# EAGLE board pcb (EAGLE 9.7.0)
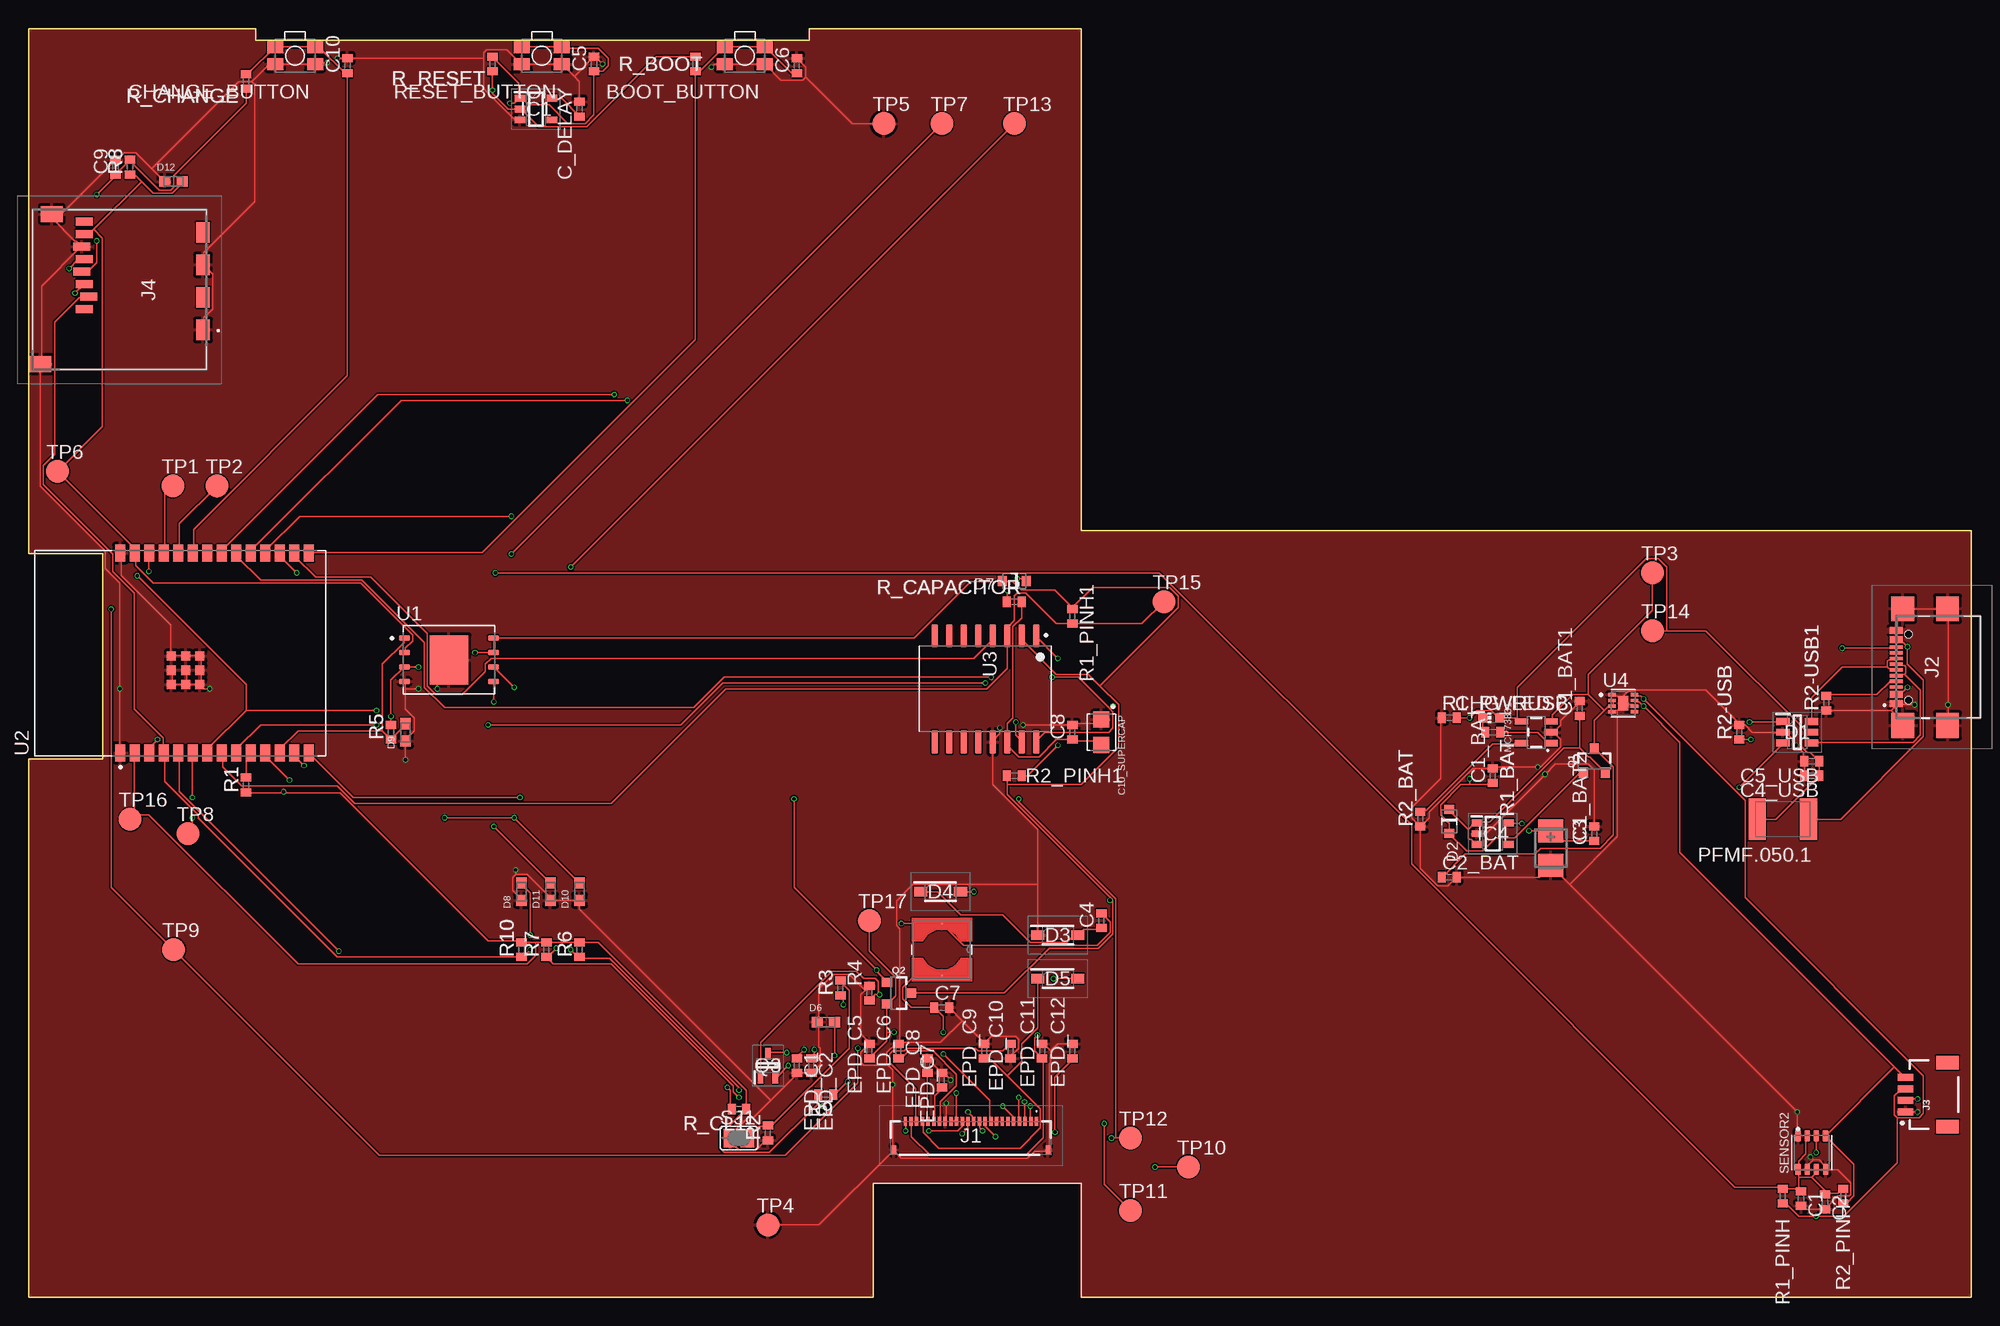
[diagram p0: board, top side]
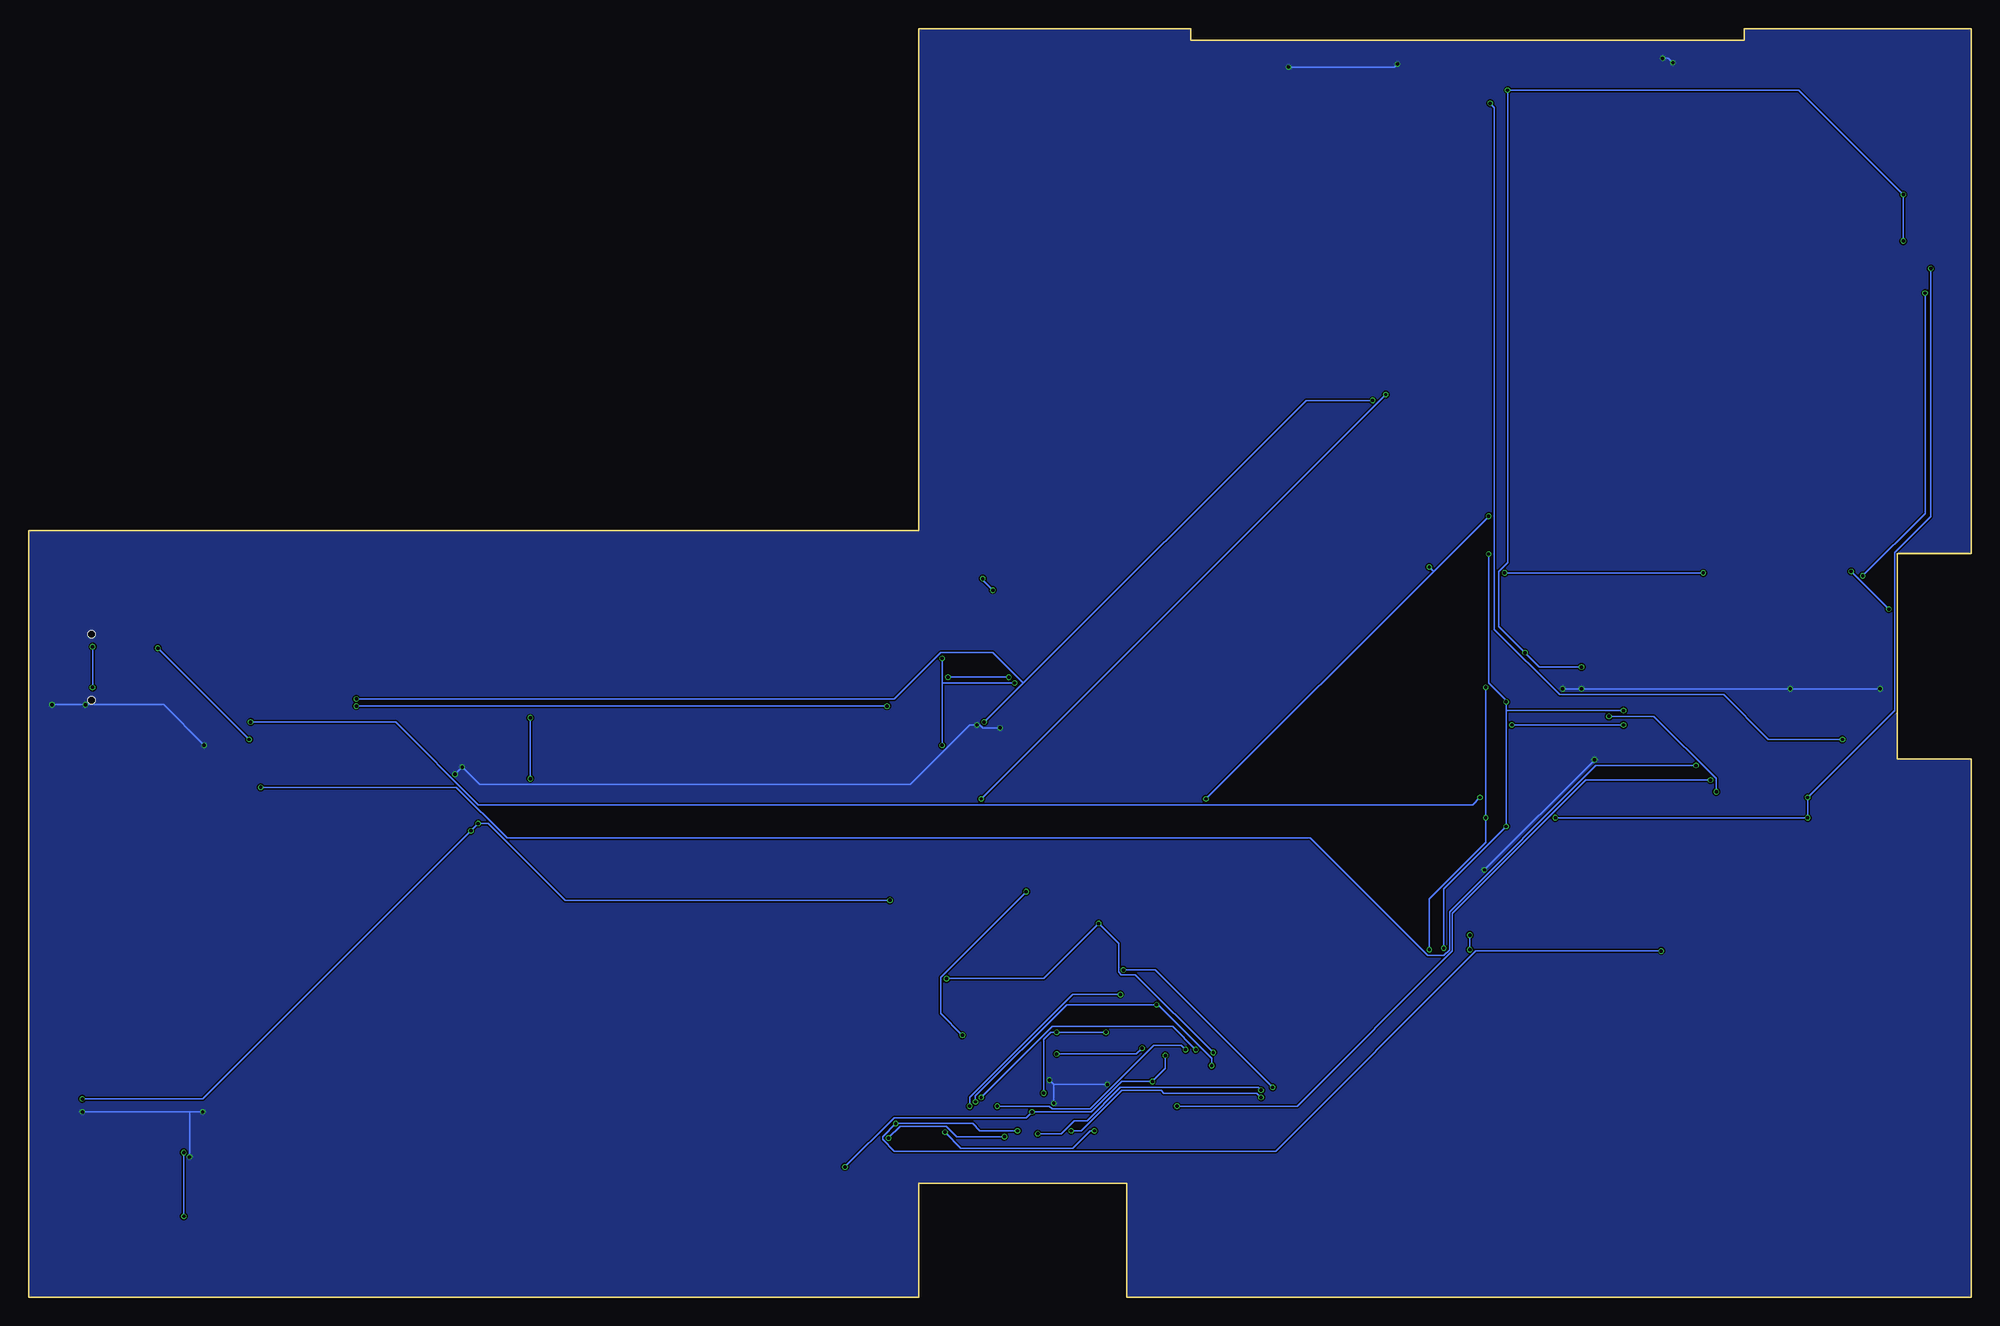
[diagram p1: board, bottom side, seen from below]

Size 170.2 x 111.2 mm. Coordinates in mm from the lower left corner, seen from the top.
Outline: 0,111.2 0,65.2 6.5,65.2 6.5,47.2 0,47.2 0,0 74,0 74,10 92.2,10 92.2,0 170.2,0 170.2,67.2 92.2,67.2 92.2,111.2 68.4,111.2 68.4,110.18 19.92,110.18 19.92,111.2 0,111.2
Copper layers (1*16): Top 0.035mm / dielectric 1.6mm / Bottom 0.035mm
Design rules "jlcpcb-2layers": minimum track width 5mil, minimum drill 0.3mm, track to track 5mil, track to pad 5mil, pad to pad 5mil, via to via 5mil, smd to smd 5mil, copper to edge 0mil, drill to drill 6mil, minimum pad ring 10mil, minimum via ring 3mil, stop-mask expansion 4mil, vias tented up to drill 0mil, thermal gap 10mil

## Footprints (pad centres in the part's own frame; a part is rotated, then mirrored left to right if it is on the bottom)
MYBUTTON = smd 1.4 x 1.05: 1 1.75,0.75; 2 -1.75,0.75; 3 -1.75,-0.75; 4 1.75,-0.75
EAGLE-LTSPICE_C0402 = smd 0.7 x 0.9: 1 -0.65,0; 2 0.65,0
RCL_CT3528 = smd 2 x 2.2: + -1.5,0; - 1.5,0
CAPCP3225X100N = smd 1.4 x 1.4: 1 -1.1,0; 2 1.1,0
ADAFRUIT_CHIP-LED0603 = smd 0.8 x 0.8: A 0,-0.75; C 0,0.75
SOT95P280X145-6N = smd 1.2 x 0.6: 1 -1.25,0.95; 2 -1.25,0; 3 -1.25,-0.95; 4 1.25,-0.95; 5 1.25,0; 6 1.25,0.95
ESP32_WROVER_AVX---SD0805S020S1R0_AVX_SD0805S020S1R0_0 = smd 0.8 x 0.9: 1 -1.05,0; 2 1.05,0
SOD3716X135N = smd 1.15 x 0.8: 1 -1.75,0; 2 1.75,0
DIOC1608X36N = smd 0.97 x 0.94: 1 -0.75,0; 2 0.75,0
ESP32_WROVER_EAGLE-LTSPICE_C0402 = smd 0.7 x 0.9: 1 -0.65,0; 2 0.65,0
SOT95P280X125-5N = smd 0.9 x 0.6: 1 -1.4,0.95; 2 -1.4,0; 3 -1.4,-0.95; 4 1.4,-0.95; 5 1.4,0.95
SOT95P280X120-5N = smd 0.9 x 0.6: 1 -1.4,0.95; 2 -1.4,0; 3 -1.4,-0.95; 4 1.4,-0.95; 5 1.4,0.95
FH34SRJ24S05SH99 = smd 0.3 x 0.8: 1 5.75,1.45; 2 5.25,1.45; 3 4.75,1.45; 4 4.25,1.45; 5 3.75,1.45; 6 3.25,1.45; 7 2.75,1.45; 8 2.25,1.45; 9 1.75,1.45; 10 1.25,1.45; 11 0.75,1.45; 12 0.25,1.45; 13 -0.25,1.45; 14 -0.75,1.45; 15 -1.25,1.45; 16 -1.75,1.45; 17 -2.25,1.45; 18 -2.75,1.45; 19 -3.25,1.45; 20 -3.75,1.45; 21 -4.25,1.45; 22 -4.75,1.45; 23 -5.25,1.45; 24 -5.75,1.45 | smd 0.4 x 0.8: MP1 6.75,-1.05; MP2 -6.75,-1.05
SAMACSYS_PARTS_USB4110GFA = smd 0.3 x 1.15: A1 -3.35,3.678; A4 -2.55,3.678; A5 -1.25,3.678; A6 -0.25,3.678; A7 0.25,3.678; A8 1.25,3.678; A9 2.55,3.678; A12 3.35,3.678; B1 3.05,3.678; B4 2.25,3.678; B5 1.75,3.678; B6 0.75,3.678; B7 -0.75,3.678; B8 -1.75,3.678; B9 -2.25,3.678; B12 -3.05,3.678 | smd 2.18 x 2: MP1 -5.11,-0.827; MP2 5.11,-0.827; MP3 -5.11,3.103; MP4 5.11,3.103 | hole 0.65: -2.89,2.603; 2.89,2.603
JST04_1MM_RA = smd 0.6 x 1.35: 1 -1.5,0; 2 -0.5,0; 3 0.5,0; 4 1.5,0 | smd 1.2 x 2: NC1 2.8,-3.675; NC2 -2.8,-3.675
112ATAARR03ATTEND = smd 1.8 x 1.2: G1 10.6,10.4; G2 4.9,10.4; S1 7.75,10.4; S2 2.05,10.4 | smd 1.4 x 1.9: G3 13.6,-3.85; G4 0.45,-2.85 | smd 0.7 x 1.5: P1 8.8,0; P2 7.7,0.4; P3 6.6,0; P4 5.5,-0.2; P5 4.4,0; P6 3.3,-0.2; P7 2.2,0; P8 1.1,0
IND_4828-WE-TPC_WRE = smd 0.127 x 0.127: 1 -2.286,0; 2 2.286,0
ESP32_WROVER_SPARKFUN-IC-POWER_SOT23-5 = smd 0.55 x 1.2: 1 -0.95,-1.3; 2 0,-1.3; 3 0.95,-1.3; 4 0.95,1.3; 5 -0.95,1.3
ESP32C6_VARISTOR_CT/CN1812 = smd 1.5 x 3.6: 1 -2.25,0; 2 2.25,0
ESP32_WROVER_SPARKFUN-DISCRETESEMI_SOT23-3 = smd 0.8 x 0.9: 1 -0.95,-1; 2 0.95,-1; 3 0,1.1
SOT65P210X110-3N = smd 1.05 x 0.5: 1 -1.05,0.65; 2 -1.05,-0.65; 3 1.05,0
ESP32_WROVER_EAGLE-LTSPICE_R0402 = smd 0.7 x 0.9: 1 -0.65,0; 2 0.65,0
ESP32_WROVER_BME680_PSON80P300X300X100-8N = smd 1.016 x 0.5: 1 1.458,1.2; 2 1.458,0.4; 3 1.458,-0.4; 4 1.458,-1.2; 5 -1.458,-1.22; 6 -1.458,-0.4; 7 -1.458,0.4; 8 -1.458,1.2
SJ = smd 1.168 x 1.6: 1 -0.762,0; 2 0.762,0
TP20R = smd 2 x 2: TP 0,0
SON127P600X800X80-9N = smd 0.94 x 0.44: 1 -3.895,1.905; 2 -3.895,0.635; 3 -3.895,-0.635; 4 -3.895,-1.905; 5 3.895,-1.905; 6 3.895,-0.635; 7 3.895,0.635; 8 3.895,1.905 | smd 3.4 x 4.3: 9 0,0
XCVR_ESP32-C6-WROOM-1-N8 = smd 1.5 x 0.9: 1 -8.75,5.26; 2 -8.75,3.99; 3 -8.75,2.72; 4 -8.75,1.45; 5 -8.75,0.18; 6 -8.75,-1.09; 7 -8.75,-2.36; 8 -8.75,-3.63; 9 -8.75,-4.9; 10 -8.75,-6.17; 11 -8.75,-7.44; 12 -8.75,-8.71; 13 -8.75,-9.98; 14 -8.75,-11.25; 15 8.75,-11.25; 16 8.75,-9.98; 17 8.75,-8.71; 18 8.75,-7.44; 19 8.75,-6.17; 20 8.75,-4.9; 21 8.75,-3.63; 22 8.75,-2.36; 23 8.75,-1.09; 24 8.75,0.18; 25 8.75,1.45; 26 8.75,2.72; 27 8.75,3.99; 28 8.75,5.26 | smd 0.8 x 0.8: 29_1 -2.755,0.79; 29_2 -1.505,0.79; 29_3 -0.255,0.79; 29_4 -2.755,-0.46; 29_5 -1.505,-0.46; 29_6 -0.255,-0.46; 29_7 -2.755,-1.71; 29_8 -1.505,-1.71; 29_9 -0.255,-1.71
SOIC127P1032X265-16N = smd 2.05 x 0.59: 1 -4.655,4.445; 2 -4.655,3.175; 3 -4.655,1.905; 4 -4.655,0.635; 5 -4.655,-0.635; 6 -4.655,-1.905; 7 -4.655,-3.175; 8 -4.655,-4.445; 9 4.655,-4.445; 10 4.655,-3.175; 11 4.655,-1.905; 12 4.655,-0.635; 13 4.655,0.635; 14 4.655,1.905; 15 4.655,3.175; 16 4.655,4.445
SON50P200X200X80-9N = smd 0.76 x 0.27: 1 -0.985,0.75; 2 -0.985,0.25; 3 -0.985,-0.25; 4 -0.985,-0.75; 5 0.985,-0.75; 6 0.985,-0.25; 7 0.985,0.25; 8 0.985,0.75 | smd 0.9 x 1.3: 9 0,0

## Placement (x,y rotation side)
BOOT_BUTTON  BUTTON_CUSYOMV1  [MYBUTTON]  62.74,108.83 180 top
C1  100nF  [EAGLE-LTSPICE_C0402]  155.27,8.67 270 top
C1_BAT  4.7uF  [EAGLE-LTSPICE_C0402]  128.27,45.72 90 top
C1_BAT1  4.7uF  [EAGLE-LTSPICE_C0402]  135.89,51.62 90 top
C1_BAT2  4.7uF  [EAGLE-LTSPICE_C0402]  137.16,40.64 90 top
C2  100nF  [EAGLE-LTSPICE_C0402]  157.37,8.37 270 top
C2_BAT  4.7uF  [EAGLE-LTSPICE_C0402]  124.46,36.83 0 top
C3  100uF TANT  [RCL_CT3528]  133.35,39.37 270 top
C4  4.7uF/25V  [EAGLE-LTSPICE_C0402]  93.98,33.02 90 top
C4_USB  100nF  [EAGLE-LTSPICE_C0402]  156.21,45.72 180 top
C5  1uF  [EAGLE-LTSPICE_C0402]  49.53,108.09 90 top
C5_USB  4.7uF  [EAGLE-LTSPICE_C0402]  156.21,46.99 180 top
C6  100nF  [EAGLE-LTSPICE_C0402]  67.31,107.95 90 top
C7  10uF  [EAGLE-LTSPICE_C0402]  80.01,25.4 0 top
C8  100nF  [EAGLE-LTSPICE_C0402]  91.44,49.53 90 top
C9  100nF  [EAGLE-LTSPICE_C0402]  7.62,99.06 90 top
C10  100nF  [EAGLE-LTSPICE_C0402]  27.94,107.95 90 top
C10_SUPERCAP  CPH3225A  [CAPCP3225X100N]  93.98,49.53 270 top
C_DELAY  100nF  [EAGLE-LTSPICE_C0402]  48.26,104.14 90 top
CHANGE_BUTTON  BUTTON_CUSYOMV1  [MYBUTTON]  23.35,108.83 180 top
CHG_LED  [ADAFRUIT_CHIP-LED0603]  128.12,50.8 90 top
D1  USBLC6-2SC6Y  [SOT95P280X145-6N]  154.94,49.53 0 top
D2  ESP32_WROVER_AVX---SD0805S020S1R0_AVX_SD0805S020S1R0_0_0AVX_SD0805S020S1R0_0_0  [ESP32_WROVER_AVX---SD0805S020S1R0_AVX_SD0805S020S1R0_0]  124.46,41.71 270 top
D3  MBR0530  [SOD3716X135N]  90.17,31.75 0 top
D4  MBR0530  [SOD3716X135N]  79.89,35.56 0 top
D5  MBR0530  [SOD3716X135N]  90.17,27.94 0 top
D6  PGB1010603MR  [DIOC1608X36N]  69.85,24.13 0 top
D7  ESP32_WROVER_AVX---SD0805S020S1R0_AVX_SD0805S020S1R0_0_0AVX_SD0805S020S1R0_0_0  [ESP32_WROVER_AVX---SD0805S020S1R0_AVX_SD0805S020S1R0_0]  86.36,62.79 180 top
D8  PGB1010603MR  [DIOC1608X36N]  43.18,35.56 90 top
D9  PGB1010603MR  [DIOC1608X36N]  33.02,49.53 90 top
D10  PGB1010603MR  [DIOC1608X36N]  48.26,35.56 90 top
D11  PGB1010603MR  [DIOC1608X36N]  45.72,35.56 90 top
D12  PGB1010603MR  [DIOC1608X36N]  12.7,97.79 0 top
EPD_C1  1uF/50V  [ESP32_WROVER_EAGLE-LTSPICE_C0402]  67.31,20.32 270 top
EPD_C2  1uF/50V  [ESP32_WROVER_EAGLE-LTSPICE_C0402]  68.58,20.32 270 top
EPD_C5  0.1uF/50V  [ESP32_WROVER_EAGLE-LTSPICE_C0402]  73.66,21.59 90 top
EPD_C6  1uF/50V  [ESP32_WROVER_EAGLE-LTSPICE_C0402]  76.2,21.59 90 top
EPD_C7  1uF/50V  [ESP32_WROVER_EAGLE-LTSPICE_C0402]  80.01,19.05 90 top
EPD_C8  1uF/50V  [ESP32_WROVER_EAGLE-LTSPICE_C0402]  78.74,20.32 90 top
EPD_C9  1uF/50V  [ESP32_WROVER_EAGLE-LTSPICE_C0402]  83.71,21.59 90 top
EPD_C10  1uF/50V  [ESP32_WROVER_EAGLE-LTSPICE_C0402]  86.03,21.59 270 top
EPD_C11  1uF/50V  [ESP32_WROVER_EAGLE-LTSPICE_C0402]  88.79,21.59 90 top
EPD_C12  1uF/50V  [ESP32_WROVER_EAGLE-LTSPICE_C0402]  91.44,21.59 90 top
IC1  BD5229G-TR  [SOT95P280X125-5N]  44.45,104.14 0 top
IC4  XC6220A331MR-G  [SOT95P280X120-5N]  128.27,40.64 0 top
J1  FH34SRJ-24S-0.5SH_99_  [FH34SRJ24S05SH99]  82.55,13.97 0 top
J2  SAMACSYS_PARTS_USB4110-GF-A  [SAMACSYS_PARTS_USB4110GFA]  167.28,55.24 90 top
J3  QWIIC_RIGHT_ANGLE  [JST04_1MM_RA]  164.43,17.78 90 top
J4  112A-TAAR-R03_ATTEND  [112ATAARR03ATTEND]  4.88,95.39 270 top
L1  68uH  [IND_4828-WE-TPC_WRE]  80.01,30.48 270 top
MCP73831  ESP32_WROVER_SPARKFUN-IC-POWER_MCP73831  [ESP32_WROVER_SPARKFUN-IC-POWER_SOT23-5]  132.08,49.53 90 top
PFMF.050.1  ESP32C6_VARISTORCN1812  [ESP32C6_VARISTOR_CT/CN1812]  153.67,41.91 180 top
Q1  20V/4.2A/52mΩ/1.4W  [ESP32_WROVER_SPARKFUN-DISCRETESEMI_SOT23-3]  137.16,46.99 0 top
Q2  20V/4.2A/52mΩ/1.4W  [ESP32_WROVER_SPARKFUN-DISCRETESEMI_SOT23-3]  76.2,26.67 270 top
Q3  SI1308EDL-T1-GE3  [SOT65P210X110-3N]  64.77,20.32 90 top
R1  10K  [ESP32_WROVER_EAGLE-LTSPICE_R0402]  19.05,44.9 90 top
R1_BAT  200  [ESP32_WROVER_EAGLE-LTSPICE_R0402]  128.27,49.53 180 top
R1_PINH  10K  [ESP32_WROVER_EAGLE-LTSPICE_R0402]  153.67,8.89 90 top
R1_PINH1  10K  [ESP32_WROVER_EAGLE-LTSPICE_R0402]  91.44,59.69 90 top
R1_PWRUSB  100K  [ESP32_WROVER_EAGLE-LTSPICE_R0402]  124.46,50.8 0 top
R2  2.2  [ESP32_WROVER_EAGLE-LTSPICE_R0402]  64.77,14.42 90 top
R2-USB  5k1  [ESP32_WROVER_EAGLE-LTSPICE_R0402]  149.86,49.53 90 top
R2-USB1  5k1  [ESP32_WROVER_EAGLE-LTSPICE_R0402]  157.48,52.07 90 top
R2_BAT  2K  [ESP32_WROVER_EAGLE-LTSPICE_R0402]  121.92,41.91 90 top
R2_PINH  10K  [ESP32_WROVER_EAGLE-LTSPICE_R0402]  158.97,8.89 90 top
R2_PINH1  10K  [ESP32_WROVER_EAGLE-LTSPICE_R0402]  86.36,45.72 180 top
R3  0.47  [ESP32_WROVER_EAGLE-LTSPICE_R0402]  71.12,27.12 90 top
R4  10K  [ESP32_WROVER_EAGLE-LTSPICE_R0402]  73.66,26.67 90 top
R5  10K  [ESP32_WROVER_EAGLE-LTSPICE_R0402]  31.75,49.53 90 top
R6  10K  [ESP32_WROVER_EAGLE-LTSPICE_R0402]  48.26,30.48 90 top
R7  10K  [ESP32_WROVER_EAGLE-LTSPICE_R0402]  45.37,30.48 90 top
R8  10K  [ESP32_WROVER_EAGLE-LTSPICE_R0402]  8.89,99.06 90 top
R9  10K  [ESP32_WROVER_EAGLE-LTSPICE_R0402]  69.85,17.78 180 top
R10  10K  [ESP32_WROVER_EAGLE-LTSPICE_R0402]  43.18,30.48 90 top
R_BOOT  10K  [ESP32_WROVER_EAGLE-LTSPICE_R0402]  58.42,108.09 270 top
R_CAPACITOR  15  [ESP32_WROVER_EAGLE-LTSPICE_R0402]  86.36,60.96 0 top
R_CHANGE  10K  [ESP32_WROVER_EAGLE-LTSPICE_R0402]  19.05,106.56 90 top
R_CL1  10K  [ESP32_WROVER_EAGLE-LTSPICE_R0402]  62.23,16.51 180 top
R_RESET  10K  [ESP32_WROVER_EAGLE-LTSPICE_R0402]  40.64,108.09 90 top
RESET_BUTTON  BUTTON_CUSYOMV1  [MYBUTTON]  44.96,108.83 180 top
SENSOR2  ESP32_WROVER_BME680_BME680  [ESP32_WROVER_BME680_PSON80P300X300X100-8N]  156.21,12.7 90 top
SJ1  [SJ]  62.23,13.97 0 top
TP1  TPTP20R  [TP20R]  12.64,71.12 0 top
TP2  TPTP20R  [TP20R]  16.51,71.12 0 top
TP3  TPTP20R  [TP20R]  142.24,63.5 0 top
TP4  TPTP20R  [TP20R]  64.77,6.35 0 top
TP5  TPTP20R  [TP20R]  74.93,102.87 0 top
TP6  TPTP20R  [TP20R]  2.54,72.39 0 top
TP7  TPTP20R  [TP20R]  80.01,102.87 0 top
TP8  TPTP20R  [TP20R]  13.97,40.64 0 top
TP9  TPTP20R  [TP20R]  12.7,30.48 0 top
TP10  TPTP20R  [TP20R]  101.6,11.43 0 top
TP11  TPTP20R  [TP20R]  96.52,7.62 0 top
TP12  TPTP20R  [TP20R]  96.52,13.97 0 top
TP13  TPTP20R  [TP20R]  86.36,102.87 0 top
TP14  TPTP20R  [TP20R]  142.24,58.42 0 top
TP15  TPTP20R  [TP20R]  99.45,60.96 0 top
TP16  TPTP20R  [TP20R]  8.89,41.91 0 top
TP17  TPTP20R  [TP20R]  73.66,33.02 0 top
U1  W25Q512JVEIQ  [SON127P600X800X80-9N]  36.83,55.88 0 top
U2  ESP32-C6-WROOM-1-N8  [XCVR_ESP32-C6-WROOM-1-N8]  13.3,56.47 90 top
U3  DS3231SN#  [SOIC127P1032X265-16N]  83.82,53.34 270 top
U4  MAX17048G+T10  [SON50P200X200X80-9N]  139.7,52.07 0 top

## Library data of the parts
BOOT_BUTTON CHANGE_BUTTON CHG_LED PFMF.050.1 RESET_BUTTON SJ1 TP1-TP17 = openbook_library
C1 C1_BAT C1_BAT1 C1_BAT2 C2 C2_BAT C4 C4_USB C5 C5_USB C6-C10 C_DELAY EPD_C1 EPD_C2 EPD_C5-EPD_C9 EPD_C11 EPD_C12 = openbook_library; SPICEMODEL: NONE; SPICEPREFIX: C
C3 = openbook_library; SPICEPREFIX: C
C10_SUPERCAP = openbook_library; AVAILABILITY: Not in stock; CHECK_PRICES: https://www.snapeda.com/parts/CPH3225A/Seiko+Instruments/view-part/?ref=eda; DESCRIPTION: 11 mF (EDLC) Supercapacitor 3.3 V 1210 (3225 Metric) - -; MF: Seiko Instruments; MP: CPH3225A; PACKAGE: 1210 Seiko; PRICE: None; PURCHASE-URL: https://www.snapeda.com/api/url_track_click_mouser/?unipart_id=562593&manufacturer=Seiko Instruments&part_name=CPH3225A&search_term=None; SNAPEDA_LINK: https://www.snapeda.com/parts/CPH3225A/Seiko+Instruments/view-part/?ref=snap
D1 = openbook_library; AVAILABILITY: In Stock; CHECK_PRICES: https://www.snapeda.com/parts/USBLC6-2SC6Y/STMicroelectronics/view-part/?ref=eda; DESCRIPTION: 17V Clamp 5A (8/20µs) Ipp Tvs Diode Surface Mount SOT-23-6; MF: STMicroelectronics; MP: USBLC6-2SC6Y; PACKAGE: SOT-23-6 STMicroelectronics; PRICE: None; SNAPEDA_LINK: https://www.snapeda.com/parts/USBLC6-2SC6Y/STMicroelectronics/view-part/?ref=snap
D2 D7 = openbook_library; CENTROID_NOT_SPECIFIED: No; DATASHEET: http://datasheets.avx.com/schottky.pdf; DIGIKEY_DESCRIPTION: DIODE SCHOTTKY 20V 1A 0805; DIGIKEY_PART_NUMBER: 478-7800-1-ND; LEAD_FREE: yes; MF: AVX; MOUSER_PART_NUMBER: 581-SD0805S020S1R0; PACKAGE: 0805 (2012 metric); PREFIX: D; ROHS: yes; TEMPERATURE_RANGE_HIGH: +125°C; TEMPERATURE_RANGE_LOW: -55°C
D3-D5 = openbook_library; AVAILABILITY: In Stock; CHECK_PRICES: https://www.snapeda.com/parts/MBR0530/Onsemi/view-part/?ref=eda; DESCRIPTION: Diode Schottky 30 V 500mA Surface Mount SOD-123; MF: ON Semiconductor; MP: MBR0530; PACKAGE: SOD-123-2 ON Semiconductor; PRICE: None; PURCHASE-URL: https://www.snapeda.com/api/url_track_click_mouser/?unipart_id=179458&manufacturer=ON Semiconductor&part_name=MBR0530&search_term=None; SNAPEDA_LINK: https://www.snapeda.com/parts/MBR0530/Onsemi/view-part/?ref=snap
D6 D8-D12 = openbook_library; AVAILABILITY: In Stock; CHECK_PRICES: https://www.snapeda.com/parts/PGB1010603MR/Littelfuse/view-part/?ref=eda; DESCRIPTION: 150V (Typ) Clamp - Ipp Tvs Diode Surface Mount 0603 (1608 Metric); MF: Littelfuse Inc.; MP: PGB1010603MR; PACKAGE: 0603 Littelfuse Inc.; PRICE: None; PURCHASE-URL: https://www.snapeda.com/api/url_track_click_mouser/?unipart_id=5659453&manufacturer=Littelfuse Inc.&part_name=PGB1010603MR&search_term=None; SNAPEDA_LINK: https://www.snapeda.com/parts/PGB1010603MR/Littelfuse/view-part/?ref=snap
EPD_C10 = openbook_library; SPICEMODEL: NONE; SPICEPREFIX: EPD_C10
IC1 = openbook_library; DESCRIPTION: Voltage Detector with Adjustable Delay Time: CMOS processes are utilized to develop high precision, low current consumption CMOS reset ICs that allow arbitrary setting of the delay time. The extensive lineup includes both Nch Open Drain and CMOS output types in a wide range of detection voltages (from 2.3V to 6.0V, in 0.1V steps), enabling selection of the ideal solution based on customer requirements. In addition, the entire series is of course both lead-free and RoHS-compliant.; HEIGHT: 1.25mm; MANUFACTURER_NAME: ROHM Semiconductor; MANUFACTURER_PART_NUMBER: BD5229G-TR; MOUSER_PART_NUMBER: 755-BD5229G-TR; MOUSER_PRICE-STOCK: https://www.mouser.co.uk/ProductDetail/ROHM-Semiconductor/BD5229G-TR?qs=4kLU8WoGk0vvnhrrYwdszw%3D%3D
IC4 = openbook_library; DESCRIPTION: LDO Voltage Regulators; HEIGHT: 1.2mm; MANUFACTURER_NAME: Torex; MANUFACTURER_PART_NUMBER: XC6220A331MR-G; MOUSER_PART_NUMBER: 865-XC6220A331MR-G; MOUSER_PRICE-STOCK: https://www.mouser.co.uk/ProductDetail/Torex-Semiconductor/XC6220A331MR-G?qs=AsjdqWjXhJ8ZSWznL1J0gg%3D%3D
J1 = openbook_library; DESCRIPTION: 24 Position FFC, FPC Connector Contacts, Top and Bottom 0.020" (0.50mm) Surface Mount, Right Angle; HEIGHT: 1.1mm; MANUFACTURER_NAME: Hirose; MANUFACTURER_PART_NUMBER: FH34SRJ-24S-0.5SH(99); MOUSER_PART_NUMBER: 798-FH34SRJ24S05SH99; MOUSER_PRICE-STOCK: https://www.mouser.co.uk/ProductDetail/Hirose-Connector/FH34SRJ-24S-0.5SH99?qs=vcbW%252B4%252BSTIpKBl5ap9J8Fw%3D%3D
J2 = openbook_library; DESCRIPTION: CONN USB 2.0 TYPE-C R/A SMT; HEIGHT: 3.26mm; MANUFACTURER_NAME: GCT (GLOBAL CONNECTOR TECHNOLOGY); MANUFACTURER_PART_NUMBER: USB4110-GF-A; MOUSER_PART_NUMBER: 640-USB4110-GF-A; MOUSER_PRICE-STOCK: https://www.mouser.co.uk/ProductDetail/GCT/USB4110-GF-A?qs=KUoIvG%2F9IlYiZvIXQjyJeA%3D%3D
J3 = openbook_library; PROD_ID: CONN-13694
J4 = openbook_library; DESCRIPTION: Micro SD Card Socket, Push-Push Type, Top Mount, SMT, H=1.83mm, 10u; HEIGHT: 1.9mm; MANUFACTURER_NAME: ATTEND; MANUFACTURER_PART_NUMBER: 112A-TAAR-R03 ATTEND
L1 = openbook_library; COPYRIGHT: Copyright (C) 2024 Ultra Librarian. All rights reserved.; MANUFACTURER_PART_NUMBER: 744043680; MFR_NAME: Wurth Electronics
MCP73831 = openbook_library; PROD_ID: IC-09995
Q1 Q2 = openbook_library; PROD_ID: TRAN-14388
Q3 = openbook_library; AVAILABILITY: In Stock; CHECK_PRICES: https://www.snapeda.com/parts/SI1308EDL-T1-GE3/Vishay+Siliconix/view-part/?ref=eda; DESCRIPTION: Si1308EDL-T1-GE3 N-channel MOSFET Transistor, 1.5 A, 30 V, 3-Pin SC-70 | Siliconix / Vishay SI1308EDL-T1-GE3; MF: Vishay Siliconix; MP: SI1308EDL-T1-GE3; PACKAGE: SOT-323 Vishay Semiconductor; PRICE: None; PURCHASE-URL: https://www.snapeda.com/api/url_track_click_mouser/?unipart_id=274603&manufacturer=Vishay Siliconix&part_name=SI1308EDL-T1-GE3&search_term=None; SNAPEDA_LINK: https://www.snapeda.com/parts/SI1308EDL-T1-GE3/Vishay+Siliconix/view-part/?ref=snap
R1 R1_BAT R1_PINH R1_PINH1 R1_PWRUSB R2 R2-USB R2-USB1 R2_BAT R2_PINH R2_PINH1 R3-R10 R_BOOT R_CAPACITOR R_CHANGE R_CL1 R_RESET = openbook_library; SPICEMODEL: NONE; SPICEPREFIX: R
SENSOR2 = openbook_library; AVAILABILITY: Unavailable; DESCRIPTION: Integrated Environmental Unit; MF: Bosch Sensortec; MP: BME680; PACKAGE: LGA-8 Bosch Tools; PRICE: None
U1 = openbook_library; AVAILABILITY: In Stock; CHECK_PRICES: https://www.snapeda.com/parts/W25Q512JVEIQ/Winbond+Electronics/view-part/?ref=eda; DESCRIPTION: FLASH - NOR Memory IC 512Mb (64M x 8) SPI - Quad I/O 133 MHz 8-WSON (8x6); MF: Winbond Electronics; MP: W25Q512JVEIQ; PACKAGE: Package; PRICE: None; SNAPEDA_LINK: https://www.snapeda.com/parts/W25Q512JVEIQ/Winbond+Electronics/view-part/?ref=snap
U2 = openbook_library; AVAILABILITY: In Stock; CHECK_PRICES: https://www.snapeda.com/parts/ESP32-C6-WROOM-1-N8/Espressif+Systems/view-part/?ref=eda; DESCRIPTION: Multiprotocol Modules ESP32-C6 module, Wi-Fi 6 in 2.4 GHz band, Bluetooth 5, Zigbee 3.0 and Thread. ESP34-WROOM Compatible - ENGINEERING SAMPLE; MF: Espressif Systems; MP: ESP32-C6-WROOM-1-N8; PACKAGE: None; PRICE: None; SNAPEDA_LINK: https://www.snapeda.com/parts/ESP32-C6-WROOM-1-N8/Espressif+Systems/view-part/?ref=snap
U3 = openbook_library; AVAILABILITY: In Stock; CHECK_PRICES: https://www.snapeda.com/parts/DS3231SN%23/Analog+Devices/view-part/?ref=eda; DESCRIPTION: Extremely Accurate I²C-Integrated RTC/TCXO/Crystal; MF: Analog Devices; MP: DS3231SN#; PACKAGE: SOIC-16 Maxim; PRICE: None; PURCHASE-URL: https://www.snapeda.com/api/url_track_click_mouser/?unipart_id=99048&manufacturer=Analog Devices&part_name=DS3231SN#&search_term=None; SNAPEDA_LINK: https://www.snapeda.com/parts/DS3231SN%23/Analog+Devices/view-part/?ref=snap
U4 = openbook_library; AVAILABILITY: In Stock; CHECK_PRICES: https://www.snapeda.com/parts/MAX17048G+T10/Analog+Devices/view-part/?ref=eda; DESCRIPTION: 3µA 1-Cell/2-Cell Fuel Gauge with ModelGauge; MF: Analog Devices; MP: MAX17048G+T10; PACKAGE: TDFN-8 Maxim; PRICE: None; PURCHASE-URL: https://www.snapeda.com/api/url_track_click_mouser/?unipart_id=329239&manufacturer=Analog Devices&part_name=MAX17048G+T10&search_term=None; SNAPEDA_LINK: https://www.snapeda.com/parts/MAX17048G+T10/Analog+Devices/view-part/?ref=snap

## Nets
3V3: C1_BAT2.1 C3.+ C9.1 D7.2 IC1.2 IC4.5 J3.2 J4.P4 Q2.3 R1.1 R1_PINH1.2 R2_PINH1.2 R5.2 R6.2 R7.2 R8.2 R9.2 R10.2 R_BOOT.1 R_CHANGE.1 R_CL1.1 R_RESET.1 TP16.TP U1.3 U1.7 U1.8 U2.2 U3.2
32KHZ: R2_PINH1.1 U2.9 U3.1
DN: D1.4 J2.A7 J2.B7
DP: D1.6 J2.A6 J2.B6
EPD_3V3: C7.1 EPD_C5.1 J1.15 J1.16 L1.2 Q2.2 TP17.TP
EPD_3V3_C: Q2.1 R_CL1.2 TP13.TP U2.18
EPD_BUSY: J1.9 TP9.TP U2.26
EPD_CS: D6.2 J1.12 R9.1 TP10.TP U2.11
EPD_DC: J1.11 TP11.TP U2.5
EPD_RST: J1.10 TP12.TP U2.21
FLASH_CS: D9.2 R5.1 U1.1 U2.12
GDR: J1.2 Q3.1 R4.1
GND: BOOT_BUTTON.1 BOOT_BUTTON.2 C1.2 C1_BAT1.2 C1_BAT2.2 C1_BAT.2 C2.2 C2_BAT.2 C3.- C4_USB.2 C5.2 C5_USB.2 C6.2 C7.2 C8.2 C9.2 C10.2 C10_SUPERCAP.1 C_DELAY.2 CHANGE_BUTTON.1 CHANGE_BUTTON.2 D1.2 D3.1 D6.1 D8.1 D9.1 D10.1 D11.1 D12.1 EPD_C1.2 EPD_C2.2 EPD_C5.2 EPD_C6.2 EPD_C7.2 EPD_C8.2 EPD_C9.2 EPD_C10.2 EPD_C11.2 EPD_C12.2 IC1.3 IC4.2 J1.17 J1.MP1 J1.MP2 J2.A1 J2.A12 J2.B1 J2.B12 J2.MP1 J2.MP2 J2.MP3 J2.MP4 J3.1 J4.G1 J4.G2 J4.G3 J4.G4 J4.P6 MCP73831.2 R1_PWRUSB.1 R2-USB1.1 R2-USB.2 R2.1 R2_BAT.1 R4.2 RESET_BUTTON.1 RESET_BUTTON.2 SENSOR2.1 SENSOR2.5 SENSOR2.7 SJ1.1 TP4.TP TP5.TP U1.4 U1.9 U2.1 U2.28 U2.29_1 U2.29_2 U2.29_3 U2.29_4 U2.29_5 U2.29_6 U2.29_7 U2.29_8 U2.29_9 U3.13 U4.1 U4.4 U4.6 U4.9
GPIO8: R1.2 U2.10
I2C_PW: C1.1 C2.1 R1_PINH.2 R2_PINH.2 SENSOR2.2 SENSOR2.6 SENSOR2.8 U2.17
INT_RTC: R1_PINH1.1 TP15.TP U2.8 U3.3
IO/BOOT: BOOT_BUTTON.3 BOOT_BUTTON.4 C6.1 R_BOOT.2 U2.15
IO/CHANGE: C10.1 CHANGE_BUTTON.3 CHANGE_BUTTON.4 R_CHANGE.2 U2.23
MISO: D12.2 J4.P7 R8.1 TP6.TP U1.2 U2.27
MOSI: D11.2 J1.14 J4.P3 R7.1 TP7.TP U1.5 U2.7
N$1: EPD_C10.1 J1.22
N$2: EPD_C8.1 J1.20
N$3: EPD_C6.1 J1.18
N$4: C4.1 D3.2 D4.1
N$5: EPD_C7.1 J1.19
N$6: EPD_C1.1 J1.4
N$7: EPD_C2.1 J1.5
N$8: J2.B5 R2-USB.1
N$9: J2.A5 R2-USB1.2
N$10: EPD_C12.1 J1.24
N$11: C1_BAT1.1 D2.1 IC4.1 IC4.3 Q1.2
N$13: MCP73831.1 R1_BAT.1
N$14: CHG_LED.C R1_BAT.2
N$15: MCP73831.5 R2_BAT.2
N$17: C_DELAY.1 IC1.5
N$18: D7.1 R_CAPACITOR.1
PREVGH: D5.1 EPD_C9.1 J1.21
PREVGL: D4.2 EPD_C11.1 J1.23
RESE: J1.3 Q3.2 R3.1
RESE': R2.2 R3.2 SJ1.2
RESET: C5.1 IC1.1 R_RESET.2 RESET_BUTTON.3 RESET_BUTTON.4 U2.3
RTC_RST: U2.16 U3.4
RX: TP2.TP U2.24
SCK: D10.2 J1.13 J4.P5 R6.1 TP8.TP U1.6 U2.6
SCL: J3.4 R2_PINH.1 SENSOR2.4 U2.20 U3.16 U4.7
SDA: J3.3 R1_PINH.1 SENSOR2.3 U2.19 U3.15 U4.8
SRC: C4.2 D5.2 L1.1 Q3.3
SS_SD: D8.2 J4.P2 R10.1 U2.4
TX: TP1.TP U2.25
USB_D+: D1.1 U2.14
USB_D-: D1.3 U2.13
VBAT: C2_BAT.1 MCP73831.3 Q1.3 TP3.TP U4.2 U4.3
VBUS: C1_BAT.1 C4_USB.1 C5_USB.1 CHG_LED.A D1.5 D2.2 MCP73831.4 PFMF.050.1.2 Q1.1 R1_PWRUSB.2 TP14.TP
VRTC: C8.1 C10_SUPERCAP.2 R_CAPACITOR.2 U3.14
VUSB: J2.A4 J2.A9 J2.B4 J2.B9 PFMF.050.1.1

## Tracks (layer width: path | path; a pad name or v marks a point on that pad's centre or on a via)
3V3  (via drill 0.3)
  Top 0.127: 62.87,16.51 61.34,14.99 60.71,14.99 60.58,14.86 60.58,13.08 60.96,12.7 64.9,12.7 69.09,16.89 69.09,17.78 R9.2 | 62.87,16.51 R_CL1.1 62.87,16.51 | 9.27,42.29 9.27,47.62 U2.2 | 9.27,42.29 TP16.TP 9.27,42.29 | 22.35,44.2 27.3,44.2 40.26,31.24 43.18,31.24 R10.2 43.18,31.11 44.45,31.11 | 22.35,44.2 19.05,44.2 R1.1 | 44.45,31.11 45.34,31.11 R7.2 45.47,31.11 48.26,31.11 | 48.26,31.11 R6.2 48.26,31.11 | 9.27,42.29 10.54,42.29 23.62,29.21 43.69,29.21 44.45,29.97 44.45,31.11 | 62.87,16.51 62.87,18.16 49.91,31.11 48.26,31.11 | R_RESET.1 40.64,107.31 v40.64,105.79 40.64,105.54 42.04,104.14 42.93,104.14 IC1.2 43.18,104.14 44.7,102.62 48.9,102.62 54.99,108.71 58.42,108.71 R_BOOT.1 | 8.76,99.57 8.89,99.69 R8.2 8.76,99.57 | 8.76,99.57 7.62,98.42 C9.1 7.62,98.3 v5.97,96.65 | 8.76,99.57 8.89,99.57 11.43,97.03 12.45,97.03 12.7,97.28 12.7,98.3 19.05,104.65 19.05,105.79 R_CHANGE.1 | v5.97,92.58 5.97,90.68 5.21,89.92 4.7,89.92 J4.P4 | v130.81,41.53 129.79,41.53 IC4.5 | v131.44,40.89 133.35,40.89 C3.+ 133.35,40.77 134.11,40.01 137.16,40.01 C1_BAT2.1 | v165.48,17.4 164.47,17.4 J3.2 | 94.87,34.92 85.72,44.07 85.72,44.96 | 94.87,34.92 95,34.8 95,31.88 93.73,30.61 89.41,30.61 85.47,26.67 77.34,26.67 Q2.3 | 85.72,44.96 85.72,45.72 R2_PINH1.2 | 93.85,53.59 95.5,51.94 95.5,48.26 92.2,44.96 85.72,44.96 | 93.85,53.59 92.84,54.61 90.04,54.61 87,57.66 87,57.91 U3.2 | R5.2 31.75,50.29 v31.75,50.93 31.75,54.1 32.89,55.24 U1.3 33.02,55.24 v34.16,55.24 | 40.77,57.78 40.77,56.52 U1.7 40.64,56.52 v39.12,56.52 | 40.77,57.78 U1.8 40.77,57.78 | 91.44,60.45 89.92,61.98 87,61.98 86.23,62.74 85.34,62.74 D7.2 85.22,62.74 82.55,62.74 77.6,57.78 40.77,57.78
  Top 0.127: 91.44,60.45 R1_PINH1.2 91.44,60.45 | 93.85,53.59 100.71,60.45 100.71,61.47 99.95,62.23 93.22,62.23 91.44,60.45 | 94.87,34.92 v94.74,34.8 | v22.35,44.32 22.35,44.2
  Bottom 0.127: v5.97,92.58 v5.97,96.65 15.11,105.79 v40.64,105.79 40.64,64.39 41.4,63.63 41.4,58.8 v39.12,56.52 37.85,55.24 v34.16,55.24 | v165.48,17.4 154.94,17.4 v131.44,40.89 v130.81,41.53 129.92,41.53 123.19,34.8 v94.74,34.8 | v22.35,44.32 22.35,45.47 27.81,50.93 v31.75,50.93
32KHZ  (via drill 0.3)
  Top 0.127: v90.17,48.39 87.5,45.72 87.12,45.72 R2_PINH1.1 | v90.17,56.01 88.27,57.91 U3.1 | v30.48,50.16 20.32,50.16 18.29,48.13 18.29,47.75 U2.9 | v40.26,50.16 57.15,50.16 60.83,53.85 v83.82,53.85
  Bottom 0.127: v90.17,56.01 90.17,53.85 | 90.17,53.85 v90.17,48.39 | v40.26,50.16 v30.48,50.16 | 90.17,53.85 v83.82,53.85
DN
  Top 0.127: 164.34,54.61 163.7,54.61 J2.B7 | 164.34,54.61 164.47,54.74 164.47,55.24 164.34,55.37 163.7,55.37 J2.A7 | 164.34,54.61 165.74,53.21 165.74,49.28 165.1,48.64 156.21,48.64 D1.4
DP
  Top 0.127: 162.81,55.24 162.94,55.12 163.58,55.12 J2.A6 | 162.81,55.24 162.81,55.75 162.94,55.88 163.58,55.88 J2.B6 | 162.81,55.24 158.88,55.24 156.21,52.58 156.21,50.55 D1.6
EPD_3V3  (via drill 0.3)
  Top 0.127: 75.18,23.24 75.18,25.65 Q2.2 75.31,25.78 75.95,26.42 75.95,28.07 73.66,30.35 TP17.TP | 75.18,23.24 75.18,22.48 73.66,20.95 EPD_C5.1 | 81.28,15.49 80.9,15.49 J1.16 | 81.28,15.49 J1.15 81.28,15.49 | L1.2 77.6,28.19 76.58,27.18 76.58,26.16 77.34,25.4 79.25,25.4 C7.1 79.38,25.4 80.14,24.64 v80.14,23.24 | v81.28,17.91 81.28,15.49 | v75.82,23.24 75.18,23.24
  Bottom 0.127: v81.28,17.91 81.28,22.61 80.64,23.24 v80.14,23.24 v75.82,23.24
EPD_3V3_C  (via drill 0.3)
  Top 0.127: v61.21,18.41 61.47,18.16 61.47,16.51 R_CL1.2 | Q2.1 75.18,27.69 74.3,28.57 v74.3,28.7 67.06,35.94 v67.06,43.69 | v42.29,68.45 23.75,68.45 20.83,65.53 20.83,65.28 U2.18 | v47.5,64.01 TP13.TP
  Bottom 0.127: v61.21,18.41 71.5,28.7 v74.3,28.7 | v67.06,43.69 47.12,63.63 | 47.12,63.63 v42.29,68.45 | 47.12,63.63 v47.5,64.01
EPD_BUSY  (via drill 0.3)
  Top 0.127: v80.14,21.34 84.2,17.27 84.2,15.49 J1.9 | v72.64,21.84 72.64,18.8 66.29,12.45 30.73,12.45 TP9.TP 7.24,35.94 v7.24,60.33 | v10.54,63.63 10.54,65.15 U2.26
  Bottom 0.127: v80.14,21.34 73.15,21.34 v72.64,21.84 | v7.24,60.33 v10.54,63.63
EPD_CS  (via drill 0.3)
  Top 0.127: v82.3,16.26 82.68,15.88 82.68,15.49 J1.12 | 70.61,17.78 v71.75,18.92 | 70.61,17.78 R9.1 70.61,17.78 | v70.61,21.21 70.61,24.13 D6.2 | v22.86,45.34 20.83,47.37 20.83,47.62 U2.11 | 70.61,17.78 v69.6,16.76 | v98.68,11.43 TP10.TP
  Bottom 0.127: v70.61,21.21 70.61,20.07 v71.75,18.92 74.42,18.92 77.09,16.26 v82.3,16.26 82.8,15.75 94.36,15.75 v98.68,11.43 | v22.86,45.34 33.78,45.34 45.47,33.66 45.47,30.35 59.05,16.76 v69.6,16.76
EPD_DC  (via drill 0.3)
  Top 0.127: v83.57,14.61 83.31,14.86 83.31,15.37 J1.11 | v94.23,15.24 94.23,9.91 TP11.TP | v27.18,30.35 13.21,44.32 13.21,47.62 U2.5
  Bottom 0.127: v83.57,14.61 86.87,14.61 87.5,15.24 v94.23,15.24 95.38,14.1 95.38,13.84 94.36,12.83 60.96,12.83 43.43,30.35 v27.18,30.35
EPD_RST  (via drill 0.3)
  Top 0.127: v84.71,14.1 83.82,14.99 83.82,15.37 J1.10 | TP12.TP 95.25,13.97 | 95.25,13.97 v94.87,13.97 | v51.31,79.12 30.61,79.12 17.02,65.53 17.02,65.28 U2.21 | v86.74,43.69 86.74,43.43 95.25,34.92 95.25,13.97
  Bottom 0.127: v84.71,14.1 88.9,14.1 89.79,14.99 93.85,14.99 v94.87,13.97 | v86.74,43.69 v51.31,79.12
FLASH_CS
  Top 0.127: 31.75,48.9 33.02,50.16 D9.2 | 31.75,48.9 R5.1 31.75,48.9 | 30.99,49.66 30.99,55.5 32.89,57.4 32.89,57.78 U1.1 | 31.75,48.9 30.99,49.66 | 30.99,49.66 23.62,49.66 22.1,48.13 22.1,47.75 U2.12
GDR  (via drill 0.3)
  Top 0.127: v87.76,16.76 87.76,15.49 J1.2 | 74.42,26.54 74.17,26.54 73.66,26.04 R4.1 | 74.42,26.54 v74.55,26.54 74.42,26.54 | 74.42,26.54 74.42,27.69 74.17,27.94 73.15,27.94 72.52,28.57 70.36,28.57 64.14,22.35 64.14,19.3 Q3.1
  Bottom 0.127: v87.76,16.76 87.76,17.53 78.74,26.54 v74.55,26.54
GND  (via drill 0.3)
  Top 0.127: 68.07,106.93 68.07,107.82 67.31,108.58 C6.2 | 68.07,106.93 67.82,106.68 65.91,106.68 64.52,108.08 BOOT_BUTTON.2 64.39,108.08 61.09,108.08 BOOT_BUTTON.1 60.96,108.08 60.07,108.08 v59.82,107.82 | TP5.TP 72.14,102.87 68.07,106.93 | 47.75,107.06 46.74,108.08 RESET_BUTTON.2 46.61,108.08 43.31,108.08 RESET_BUTTON.1 43.18,108.08 41.91,109.35 40.13,109.35 39.88,109.09 39.88,108.58 | 47.75,107.06 48.26,106.55 48.26,104.9 C_DELAY.2 | 47.75,107.06 47.88,107.06 49.53,108.71 C5.2 49.53,108.84 v50.29,108.08 | 39.88,108.58 39.88,105.92 42.55,103.25 42.93,103.25 IC1.3 | 39.88,108.58 27.94,108.58 | 27.94,108.58 C10.2 27.94,108.58 | 33.02,53.34 33.02,51.56 33.78,50.8 33.78,49.66 33.02,48.9 D9.1 33.02,48.77 v33.02,47.12 | 33.02,53.34 33.02,53.98 U1.4 | v34.16,53.34 33.02,53.34 | v35.81,53.34 35.81,54.86 U1.9 | U2.29_7 15.11,53.72 15.11,54.86 U2.29_8 15.11,54.99 15.11,56.13 U2.29_9 14.99,56.26 13.84,56.26 U2.29_6 13.72,56.26 12.57,56.26 U2.29_3 12.45,56.26 12.45,58.93 8.13,63.25 8.13,65.15 U2.28 | 12.57,53.72 12.57,54.86 U2.29_2 | 12.57,53.72 U2.29_1 12.57,53.72 | 13.84,53.72 13.84,54.86 U2.29_5 | 13.84,53.72 U2.29_4 | 12.57,53.72 13.72,53.72 U2.29_4 | 13.84,53.72 14.99,53.72 U2.29_7 | 13.84,53.72 U2.29_4 | v15.88,53.34 15.37,53.34 15.11,53.59 U2.29_7 | U2.1 8,47.75 v8,53.34 8,62.61 6.73,63.88 6.73,65.41 1.02,71.12 1.02,81.79 J4.G3 1.14,81.92 1.14,88.65 4.57,92.08 J4.P6 4.57,92.2 4.19,92.58 4.06,92.58 2.03,94.61 2.03,94.87 J4.G4 2.03,95 2.92,95 7.62,99.69 C9.2 7.62,99.82 7.87,99.82 8.38,100.33 9.4,100.33 10.79,98.93 | J4.G1 15.37,84.84 15.37,85.85 16.13,86.61 16.13,89.66 15.37,90.42 J4.G2 15.37,90.55 15.37,91.57 19.81,96.01 19.81,106.3 19.56,106.55
  Top 0.127: 10.79,98.93 11.94,97.79 D12.1 | 19.56,106.55 21.08,108.08 CHANGE_BUTTON.1 21.72,108.08 25.02,108.08 CHANGE_BUTTON.2 25.15,108.2 v26.16,108.2 | 19.56,106.55 18.41,106.55 10.79,98.93 | v27.05,108.58 27.94,108.58 | 42.67,37.08 42.42,36.83 42.42,35.69 43.18,34.92 D8.1 | 42.67,37.08 43.69,37.08 45.72,35.05 45.72,34.92 D11.1 45.72,34.8 48.26,34.8 | 48.26,34.8 D10.1 48.26,34.8 | R2.1 64.77,13.72 64.52,13.72 63.75,12.95 62.23,12.95 61.47,13.72 SJ1.1 61.47,14.22 62.99,15.75 63.5,15.75 65.02,17.27 | 68.58,19.68 67.31,19.68 EPD_C1.2 67.31,19.56 65.02,17.27 | 68.58,19.68 EPD_C2.2 68.58,19.68 | 69.22,24.13 69.22,21.97 69.34,21.84 69.34,20.45 68.58,19.68 | 69.22,24.13 D6.1 69.22,24.13 | 48.26,34.8 48.26,34.04 65.02,17.27 | C10_SUPERCAP.1 93.98,50.55 93.73,50.29 91.44,50.29 C8.2 91.44,50.16 v87.12,50.16 | 88.39,36.2 88.39,41.02 84.45,44.96 84.45,48.64 U3.13 84.45,48.77 85.09,49.4 v85.09,49.91 | 88.39,36.2 88.39,31.75 D3.1 | 89.53,21.59 89.53,20.57 89.41,20.45 89.41,12.95 J1.MP1 89.28,12.83 88.14,12.83 87.5,12.19 76.45,12.19 75.82,12.83 J1.MP2 | 89.53,21.59 88.9,22.23 EPD_C11.2 | 89.53,21.59 90.17,22.23 91.44,22.23 EPD_C12.2 | 81.79,24.26 80.64,25.4 C7.2 | 81.79,24.26 83.69,22.35 EPD_C9.2 83.82,22.35 84.33,22.86 86.49,22.86 86.74,22.61 86.74,21.84 86.11,21.21 86.11,20.95 EPD_C10.2 | v80.39,17.02 80.39,15.49 J1.17 | v80.77,19.05 80.01,19.81 EPD_C7.2 80.01,19.68 78.74,20.95 EPD_C8.2 | 75.31,20.32 75.18,20.45 75.18,21.46 75.95,22.23 76.2,22.23 EPD_C6.2 | 75.31,20.32 75.69,19.94 v75.69,18.67 75.69,12.95 J1.MP2 | 75.31,20.32 73.15,20.32 72.9,20.57 72.9,21.46 73.66,22.23 EPD_C5.2 73.66,22.35 72.9,23.11 72.9,26.54 73.28,26.92
  Top 0.127: 73.28,26.92 73.66,27.3 R4.2 | TP4.TP 69.22,6.35 75.69,12.83 J1.MP2 | 81.79,24.26 79.88,22.35 76.33,22.35 | 76.33,22.35 76.2,22.35 EPD_C6.2 | 88.39,36.2 77.47,36.2 76.04,34.76 76.04,32.59 76.33,32.3 76.33,22.35 | 76.33,22.35 EPD_C6.2 | 69.22,24.13 69.22,27.05 70.48,28.32 71.88,28.32 73.28,26.92 | 163.19,51.44 157.48,51.44 R2-USB1.1 | 163.19,51.44 163.58,51.82 J2.A1 | J2.B12 163.58,52.07 163.58,51.94 J2.A1 | 163.19,51.44 164.08,50.55 164.08,50.16 J2.MP3 | J2.B1 163.58,58.42 163.58,58.55 J2.A12 163.7,58.67 163.7,59.94 164.08,60.33 J2.MP4 164.21,60.33 168.02,60.33 J2.MP2 168.15,60.33 v168.15,51.94 168.15,50.16 J2.MP1 | v165.23,51.94 163.7,51.94 J2.A1 | 139.19,51.44 138.81,51.44 U4.4 | 139.7,51.94 139.19,51.44 | U4.9 139.7,51.94 | 139.45,52.45 139.7,52.2 U4.9 | 139.45,52.45 139.19,52.7 138.81,52.7 U4.1 | 139.7,51.94 140.59,51.94 U4.6 | 139.7,51.94 U4.9 | C4_USB.2 155.57,45.72 155.57,46.99 C5_USB.2 155.45,46.99 155.45,47.75 v154.81,48.39 154.56,48.64 154.56,48.9 153.92,49.53 153.8,49.53 D1.2 153.67,49.53 151,49.53 150.37,50.16 149.86,50.16 R2-USB.2 149.86,50.29 146.94,53.21 140.21,53.21 139.45,52.45 | 139.45,52.45 U4.9 | IC4.2 127.64,40.64 v132.84,45.85 133.73,46.74 136.65,46.74 137.16,46.23 137.16,41.4 C1_BAT2.2 | 133.6,49.53 134.24,48.9 134.24,48.26 132.46,46.48 v132.21,46.48 128.27,46.48 C1_BAT.2 128.27,46.35 126.49,46.35 122.68,42.55 122.68,42.04 121.92,41.27 | 133.6,49.53 133.48,49.53 MCP73831.2 133.6,49.53 | 133.6,49.53 134.24,50.16 134.24,50.55 135.89,52.2 C1_BAT1.2 | R2_BAT.1 121.92,41.15 121.92,37.59 123.44,36.07 124.33,36.07 125.09,36.83 C2_BAT.2 125.22,36.83 132.33,36.83 133.35,37.85
  Top 0.127: 121.92,41.27 121.16,42.04 121.16,42.93 123.7,45.47 123.7,50.8 R1_PWRUSB.1 | 121.92,41.27 R2_BAT.1 | 121.92,41.27 R2_BAT.1 | 156.34,12.06 155.83,11.56 155.83,11.3 SENSOR2.7 | 156.34,12.06 156.84,12.06 157.35,11.56 157.35,11.3 SENSOR2.5 157.48,11.18 158.5,11.18 159.64,10.03 159.64,9.02 159.51,8.89 158.5,8.89 157.35,7.75 | 157.35,7.75 155.57,7.75 155.32,8 C1.2 | 157.35,7.75 C2.2 157.35,7.75 | 133.35,37.85 135,36.2 | 135,36.2 v154.94,16.26 154.94,14.22 SENSOR2.1 | 133.35,37.85 C3.- 133.35,37.85 | v165.48,16.26 164.47,16.26 J3.1 | v156.08,12.32 156.34,12.06 | 139.19,51.44 139.19,40.39 135,36.2 | 42.67,37.08 v42.67,37.47
  Bottom 0.127: v59.82,107.82 50.55,107.82 v50.29,108.08 | v35.81,53.34 v34.16,53.34 v15.88,53.34 v8,53.34 | v27.05,108.58 26.54,108.58 v26.16,108.2 | v85.09,49.91 86.61,49.91 86.87,50.16 v87.12,50.16 87.76,50.16 92.96,44.96 130.68,44.96 v132.21,46.48 v132.84,45.85 | 80.39,18.67 v80.39,17.02 | v80.77,19.05 80.39,18.67 | v75.69,18.67 80.39,18.67 | v168.15,51.94 v165.23,51.94 158.37,51.94 v154.81,48.39 | v154.94,16.26 156.08,16.26 | 156.08,16.26 v165.48,16.26 | 156.08,16.26 v156.08,12.32 | v42.67,37.47 v33.02,47.12
  pour Top: 6.56,47.16 6.54,47.14 6.52,47.12 0.08,47.12 0.08,0.08 73.92,0.08 73.92,10.02 73.94,10.04 73.96,10.06 73.98,10.08 92.22,10.08 92.24,10.06 92.26,10.04 92.28,10.02 92.28,0.08 170.12,0.08 170.12,67.12 92.18,67.12 92.16,67.14 92.14,67.16 92.12,67.18 92.12,111.12 68.48,111.12 68.48,110.16 68.46,110.14 68.44,110.12 68.42,110.1 19.9,110.1 19.88,110.12 19.86,110.14 19.84,110.16 19.84,111.12 0.08,111.12 0.08,65.28 6.52,65.28 6.54,65.26 6.56,65.24 6.58,65.22 6.58,47.18
  pour Bottom: 6.56,47.16 6.54,47.14 6.52,47.12 0.08,47.12 0.08,0.08 73.92,0.08 73.92,10.02 73.94,10.04 73.96,10.06 73.98,10.08 92.22,10.08 92.24,10.06 92.26,10.04 92.28,10.02 92.28,0.08 170.12,0.08 170.12,67.12 92.18,67.12 92.16,67.14 92.14,67.16 92.12,67.18 92.12,111.12 68.48,111.12 68.48,110.16 68.46,110.14 68.44,110.12 68.42,110.1 19.9,110.1 19.88,110.12 19.86,110.14 19.84,110.16 19.84,111.12 0.08,111.12 0.08,65.28 6.52,65.28 6.54,65.26 6.56,65.24 6.58,65.22 6.58,47.18
GPIO8
  Top 0.127: R1.2 19.05,45.59 19.05,47.24 19.43,47.62 U2.10
I2C_PW  (via drill 0.3)
  Top 0.127: R2_PINH.2 158.88,9.53 158.5,9.14 157.48,9.14 C2.1 157.35,9.14 157.35,9.4 156.21,10.54 | 155.07,9.53 153.67,9.53 R1_PINH.2 153.67,9.65 149.48,9.65 121.16,37.97 121.16,41.4 99.06,63.5 v40.89,63.5 | 155.07,9.53 155.19,9.4 C1.1 155.07,9.53 | 155.07,9.53 155.07,10.54 | 155.07,10.54 155.07,11.18 SENSOR2.8 155.07,11.3 155.07,11.94 155.7,12.57 155.7,14.1 SENSOR2.2 | 156.21,10.54 156.59,10.92 156.59,11.18 SENSOR2.6 | 155.07,10.54 156.21,10.54 | v23.5,63.5 22.1,64.9 22.1,65.15 U2.17
  Bottom 0.127: v40.89,63.5 v23.5,63.5
INT_RTC
  Top 0.127: 91.44,59.05 97.54,59.05 TP15.TP | 91.44,59.05 R1_PINH1.1 91.44,59.05 | U2.8 17.02,47.62 17.02,46.48 18.67,44.83 27.05,44.83 28.57,43.31 51.05,43.31 61.09,53.34 83.95,53.34 85.72,55.12 85.72,57.91 U3.3 85.72,58.04 85.72,58.67 86.36,59.31 86.36,61.47 86.61,61.72 87.38,61.72 90.04,59.05 91.44,59.05
IO/BOOT
  Top 0.127: C6.1 67.31,107.31 66.8,107.31 64.52,109.6 BOOT_BUTTON.3 64.39,109.6 61.09,109.6 BOOT_BUTTON.4 60.96,109.6 58.8,107.44 R_BOOT.2 58.42,107.31 58.42,83.95 39.75,65.28 24.64,65.28 U2.15
IO/CHANGE
  Top 0.127: R_CHANGE.2 19.05,107.31 19.3,107.31 21.59,109.6 CHANGE_BUTTON.4 21.72,109.6 25.02,109.6 CHANGE_BUTTON.3 25.15,109.47 25.53,109.47 27.69,107.31 27.94,107.31 C10.1 27.94,107.19 27.94,80.77 14.48,67.31 14.48,65.28 U2.23
MISO
  Top 0.127: 9.91,97.79 10.92,96.77 12.57,96.77 13.34,97.54 13.34,97.79 D12.2 | 9.91,97.79 9.4,98.3 8.89,98.3 R8.1 | 9.91,97.79 5.71,93.6 | 5.71,93.6 5.33,93.22 4.95,93.22 J4.P7 | U1.2 33.02,56.52 33.02,56.9 33.66,57.53 33.66,58.04 29.08,62.61 10.92,62.61 9.4,64.14 9.4,65.15 U2.27 9.27,65.28 9.27,65.66 TP6.TP 6.48,76.33 6.48,92.84 5.71,93.6
MOSI  (via drill 0.3)
  Top 0.127: v78.87,14.61 81.41,14.61 81.79,14.99 81.79,15.37 J1.14 | v62.23,17.53 61.72,18.03 61.72,18.54 51.05,29.21 45.97,29.21 45.47,29.72 R7.1 45.47,29.84 v46.23,30.61 | v40.77,52.2 40.77,53.98 U1.5 | v40.77,41.27 45.72,36.32 D11.2 | 19.05,51.44 15.75,48.13 15.75,47.75 U2.7 | v30.48,51.44 19.05,51.44 | v4.06,88.01 4.83,88.77 J4.P3 | v9.53,63.25 19.05,53.72 19.05,51.44 | v42.29,65.15 TP7.TP
  Bottom 0.127: v78.87,14.61 77.98,14.61 74.42,18.16 70.99,18.16 70.74,17.91 62.61,17.91 v62.23,17.53 | 40.77,51.44 v40.77,41.27 46.23,35.81 v46.23,30.61 | 40.77,51.44 v40.77,52.2 40.77,52.32 42.29,53.85 v42.29,65.15 | 40.77,51.44 v30.48,51.44 | v4.06,88.01 4.06,68.71 v9.53,63.25
N$1
  Top 0.127: J1.22 77.72,15.49 77.72,18.29 75.44,20.57 75.44,21.34 75.69,21.59 76.71,21.59 76.96,21.84 82.93,21.84 83.19,21.59 85.34,21.59 85.98,22.23 EPD_C10.1
N$2
  Top 0.127: J1.20 78.74,15.49 78.74,19.56 EPD_C8.1
N$3
  Top 0.127: J1.18 79.88,15.49 79.88,17.14 81.28,18.54 81.28,19.56 79.25,21.59 77.09,21.59 76.45,20.95 76.2,20.95 EPD_C6.1
N$4
  Top 0.127: C4.1 93.98,32.26 92.46,32.26 91.95,31.75 D3.2 91.82,31.75 91.57,31.75 90.93,31.11 87.76,31.11 85.34,33.53 81.66,33.53 79.63,35.56 78.23,35.56 D4.1
N$5
  Top 0.127: J1.19 79.38,15.49 79.38,17.65 80.01,18.29 EPD_C7.1
N$6  (via drill 0.3)
  Top 0.127: v86.74,17.53 86.74,15.49 J1.4 | v67.94,21.72 67.31,21.08 EPD_C1.1
  Bottom 0.127: v86.74,17.53 80.52,23.75 69.98,23.75 v67.94,21.72
N$7  (via drill 0.3)
  Top 0.127: v85.34,16.76 86.23,15.88 86.23,15.49 J1.5 | v68.83,21.72 68.83,21.34 68.58,21.08 EPD_C2.1
  Bottom 0.127: v85.34,16.76 80.77,16.76 80.52,16.51 77.22,16.51 71.63,22.1 69.22,22.1 v68.83,21.72
N$8  (via drill 0.3)
  Top 0.127: v150.88,48.9 149.86,48.9 R2-USB.1 | v158.88,56.9 163.58,56.9 J2.B5
  Bottom 0.127: v158.88,56.9 v150.88,48.9
N$9
  Top 0.127: R2-USB1.2 157.48,52.83 161.93,52.83 163.07,53.98 163.58,53.98 J2.A5
N$10  (via drill 0.3)
  Top 0.127: v76.83,14.61 76.83,15.37 J1.24 | v89.92,14.48 89.92,19.3 91.44,20.83 EPD_C12.1
  Bottom 0.127: v76.83,14.61 77.22,14.61 78.74,13.08 88.52,13.08 v89.92,14.48
N$11
  Top 0.127: 126.11,41.02 126.11,40.26 126.24,40.13 126.36,40.13 126.75,39.75 IC4.3 | 126.11,41.02 126.75,41.66 IC4.1 126.87,41.66 128.02,41.66 134.49,48.13 135.89,48.13 | 126.11,41.02 124.46,42.67 D2.1 | 135.89,48.13 136.65,47.37 136.78,47.37 138.05,46.1 Q1.2 | 135.89,48.13 135.89,50.93 C1_BAT1.1
N$13
  Top 0.127: R1_BAT.1 129.03,49.53 132.21,49.53 133.1,48.64 133.35,48.64 MCP73831.1
N$14
  Top 0.127: CHG_LED.C 127.38,50.8 127.38,49.66 127.51,49.53 R1_BAT.2
N$15
  Top 0.127: R2_BAT.2 121.92,42.67 122.43,42.67 128.27,48.51 130.68,48.51 MCP73831.5
N$17
  Top 0.127: IC1.5 45.97,105.03 46.74,105.03 48.26,103.5 C_DELAY.1
N$18  (via drill 0.3)
  Top 0.127: v85.72,61.98 85.72,60.96 R_CAPACITOR.1 | v86.61,62.99 87.25,62.99 87.38,62.87 D7.1
  Bottom 0.127: v85.72,61.98 86.61,62.87 v86.61,62.99
PREVGH
  Top 0.127: 85.72,19.43 84.33,20.83 83.82,20.83 EPD_C9.1 | 85.72,19.43 88.65,16.51 88.65,14.86 86.87,13.08 79.76,13.08 78.36,14.48 78.36,15.37 J1.21 | 85.72,19.43 87,20.7 87,22.23 88.39,23.62 88.39,27.94 D5.1
PREVGL  (via drill 0.3)
  Top 0.127: J1.23 77.34,15.37 77.34,14.1 78.99,12.45 87.38,12.45 88.9,13.97 88.9,20.83 EPD_C11.1 88.77,20.95 88.14,21.59 88.14,22.73 v88.39,22.99 | v82.8,35.56 81.66,35.56 D4.2
  Bottom 0.127: v82.8,35.56 90.3,28.07 90.3,24.89 v88.39,22.99
RESE  (via drill 0.3)
  Top 0.127: v87.25,17.14 87.25,15.49 J1.3 | v71.37,25.65 71.37,26.16 71.12,26.42 R3.1 | v66.55,20.32 65.53,19.3 Q3.2
  Bottom 0.127: v87.25,17.14 87.25,17.65 79.25,25.65 v71.37,25.65 71.25,25.65 66.55,20.95 v66.55,20.32
RESE'
  Top 0.127: SJ1.2 64.01,14.99 64.77,14.99 R2.2 64.77,15.11 65.15,15.11 71.88,21.84 71.88,26.92 71.12,27.69 R3.2
RESET  (via drill 0.3)
  Top 0.127: RESET_BUTTON.4 43.31,109.6 46.61,109.6 RESET_BUTTON.3 46.74,109.47 49.91,109.47 50.8,108.58 50.8,107.95 50.29,107.44 C5.1 49.53,107.31 49.53,103.63 48.77,102.87 47.24,102.87 45.59,104.52 43.81,104.52 43.31,105.03 43.05,105.03 IC1.1 | IC1.1 42.93,105.16 42.93,106.43 40.64,108.71 R_RESET.2 | v11.3,48.9 10.67,48.26 10.67,47.75 U2.3 | v42.16,104.65 42.55,104.65 42.93,105.03 IC1.1
  Bottom 0.127: v11.3,48.9 17.78,48.9 21.72,52.83 36.07,52.83 41.78,58.55 41.78,104.27 v42.16,104.65
RTC_RST
  Top 0.127: U2.16 23.37,65.15 23.37,64.9 25.15,63.12 29.97,63.12 34.92,58.17 34.92,53.59 35.69,52.83 37.97,52.83 40.01,54.86 40.01,55.5 40.51,56.01 82.8,56.01 84.45,57.66 84.45,57.91 U3.4
RX
  Top 0.127: TP2.TP 13.21,67.82 13.21,65.28 U2.24
SCK  (via drill 0.3)
  Top 0.127: v14.35,43.81 14.35,47.62 U2.6 | v14.35,42.04 14.35,41.02 TP8.TP | v3.56,90.17 4.32,90.93 4.83,90.93 J4.P5 | v42.55,53.47 40.77,55.24 U1.6 | D10.2 48.26,36.32 v42.55,42.04 v36.45,42.04 | v81.79,14.35 82.3,14.86 82.3,15.37 J1.13 | v62.23,18.16 62.23,18.41 50.93,29.72 48.26,29.72 | 48.26,29.72 R6.1 48.26,29.72 | 48.26,29.72 v47.5,30.48
  Bottom 0.127: v3.56,90.17 3.56,68.45 6.73,65.28 6.73,51.44 v14.35,43.81 v14.35,42.04 v36.45,42.04 | v42.55,53.47 v42.55,42.04 42.55,39.88 47.5,34.92 v47.5,30.48 | v81.79,14.35 79.76,14.35 78.61,15.49 77.47,15.49 74.55,18.41 62.48,18.41 v62.23,18.16
SCL  (via drill 0.3)
  Top 0.127: R2_PINH.1 159,8.26 159.26,8.26 159.89,8.89 159.89,11.68 157.48,14.1 SENSOR2.4 157.48,14.22 163.45,20.19 | 163.45,20.19 164.34,19.3 J3.4 | 163.45,20.19 144.65,38.99 144.65,48.64 v141.48,51.82 141.1,52.2 140.72,52.2 U4.7 | v84.33,54.36 60.96,54.36 58.29,51.69 36.45,51.69 34.67,53.47 34.67,57.4 29.21,62.87 20.32,62.87 18.29,64.9 18.29,65.15 U2.20 | v89.66,54.36 91.95,54.36 94.74,51.56 | 94.74,51.56 95,51.31 95,49.91 94.61,49.53 89.03,49.53 88.27,48.77 U3.16 | 94.74,51.56 v95,51.82
  Bottom 0.127: v89.66,54.36 v84.33,54.36 | v95,51.82 v141.48,51.82
SDA  (via drill 0.3)
  Top 0.127: 163.7,15.75 165.61,15.75 165.99,16.13 165.99,19.43 150.37,35.05 150.37,43.56 v141.48,52.45 141.22,52.7 140.72,52.7 U4.8 | 163.7,15.75 163.45,16 163.45,17.65 163.96,18.16 164.34,18.16 J3.3 | 163.7,15.75 163.7,11.81 159,7.11 v156.59,7.11 155.07,7.11 154.05,8.13 153.67,8.13 R1_PINH.1 | v156.59,12.7 156.59,14.1 SENSOR2.3 | v52.45,78.61 32.64,78.61 19.56,65.53 19.56,65.28 U2.19 | v86.49,50.42 86.49,49.28 87,48.77 U3.15
  Bottom 0.127: v156.59,7.11 v156.59,12.7 | v52.45,78.61 58.29,78.61 83.06,53.85 | v86.49,50.42 83.06,53.85 | v141.48,52.45 94.36,52.45 90.3,56.52 85.72,56.52 83.06,53.85
SRC  (via drill 0.3)
  Top 0.127: C4.2 93.98,33.66 94.74,32.89 94.74,32 93.6,30.86 81.92,30.86 L1.1 v76.45,32.77 | v66.42,21.46 64.77,21.46 Q3.3 | v89.79,27.94 91.82,27.94 D5.2
  Bottom 0.127: v89.79,27.94 81.28,27.94 v76.45,32.77 74.71,31.02 74.71,28.53 74.47,28.29 73.24,28.29 v66.42,21.46
SS_SD  (via drill 0.3)
  Top 0.127: v43.94,31.75 43.94,35.43 43.18,36.2 D8.2 | v43.94,30.48 43.18,29.72 R10.1 43.18,29.84 27.05,29.84 14.86,42.04 14.86,42.29 11.94,45.21 11.94,47.62 U2.4 11.81,47.75 11.81,49.02 9.27,51.56 9.27,61.72 7.37,63.63 7.37,65.15 1.27,71.25 1.27,72.9 2.29,73.91 2.29,85.47 4.45,87.63 5.21,87.63 J4.P2
  Bottom 0.127: v43.94,30.48 v43.94,31.75
TX
  Top 0.127: U2.25 11.94,65.28 11.94,70.48 12.57,71.12 TP1.TP
USB_D+  (via drill 0.3)
  Top 0.127: v150.75,50.42 153.67,50.42 D1.1 | v43.05,43.81 28.45,43.81 24.64,47.62 U2.14
  Bottom 0.127: v150.75,50.42 138.05,50.42 130.81,43.18 43.69,43.18 v43.05,43.81
USB_D-  (via drill 0.3)
  Top 0.127: v149.86,44.7 153.67,48.51 D1.3 | v24.13,46.61 23.37,47.37 23.37,47.62 U2.13
  Bottom 0.127: v149.86,44.7 132.72,44.7 128.27,40.26 57.91,40.26 47.62,29.97 46.23,29.97 45.72,30.48 45.72,33.78 32.89,46.61 v24.13,46.61
VBAT
  Top 0.127: U4.2 138.81,52.2 138.81,51.94 U4.3 138.68,51.82 138.43,51.82 138.05,51.44 | 137.16,48.13 138.81,46.48 138.81,40.51 137.67,39.37 132.46,39.37 131.95,38.86 125.86,38.86 123.83,36.83 C2_BAT.1 | 137.16,48.13 Q1.3 137.16,48.13 | 138.05,51.44 137.16,50.55 137.16,48.13 | 136.65,52.83 135.25,52.83 133.48,51.05 133.48,50.55 MCP73831.3 | 138.05,51.44 136.65,52.83 | TP3.TP 142.24,60.2 136.65,54.61 136.65,52.83
VBUS  (via drill 0.3)
  Top 0.127: 126.24,44.96 128.27,44.96 C1_BAT.1 | 126.24,44.96 125.48,44.96 123.7,43.18 123.7,42.29 124.46,41.53 124.46,40.77 D2.2 124.46,40.64 125.98,39.12 127.38,39.12 128.52,40.26 130.18,40.26 135.89,45.97 136.14,45.97 Q1.1 | 130.43,50.8 128.91,50.8 CHG_LED.A 128.78,50.8 128.14,51.44 126.87,51.44 v126.24,50.8 125.22,50.8 R1_PWRUSB.2 | 130.43,50.8 130.68,50.55 MCP73831.4 | 156.84,46.99 156.84,45.72 | 156.84,45.72 C4_USB.1 156.84,45.72 | 156.84,46.99 C5_USB.1 156.84,46.99 | 155.96,49.4 155.7,49.15 155.57,49.15 155.32,48.9 155.32,48.26 155.83,47.75 156.08,47.75 156.84,46.99 | 155.96,49.4 156.08,49.53 D1.5 155.96,49.4 | 143.51,58.42 146.94,58.42 155.96,49.4 | 143.51,58.42 TP14.TP | 130.43,50.8 130.43,53.47 141.73,64.77 142.75,64.77 143.51,64.01 143.51,58.42 | 156.84,45.72 153.03,41.91 151.51,41.91 PFMF.050.1.2 | v126.24,45.47 126.24,44.96
  Bottom 0.127: v126.24,50.8 v126.24,45.47
VRTC
  Top 0.127: C10_SUPERCAP.2 93.98,48.51 93.73,48.77 91.44,48.77 C8.1 91.44,48.9 90.04,48.9 88.52,47.37 86.74,47.37 85.72,48.39 85.72,48.64 U3.14 85.72,48.77 85.72,50.29 86.23,50.8 86.23,58.8 87,59.56 87,60.96 R_CAPACITOR.2
VUSB  (via drill 0.3)
  Top 0.127: J2.A4 163.58,52.7 163.58,52.96 J2.B9 163.7,53.09 164.21,53.09 v164.59,53.47 | J2.A9 163.58,57.78 163.58,57.53 J2.B4 163.7,57.4 164.21,57.4 v164.59,57.02 164.59,55.5 165.99,54.1 165.99,49.15 158.75,41.91 155.96,41.91 PFMF.050.1.1
  Bottom 0.127: v164.59,57.02 v164.59,53.47